# Altium PCB 8 Motors.PcbDoc (part 2 of 4)
Units mm, origin at the board's own origin, x right, y up, seen from the top; angles counter-clockwise.
Board outline 155 x 95 mm, 4 copper layers (Top Layer, GND, POWER, Bottom Layer), stack 0.778 mm thick; 196 components, 175 nets, 825 pads, 449 vias.
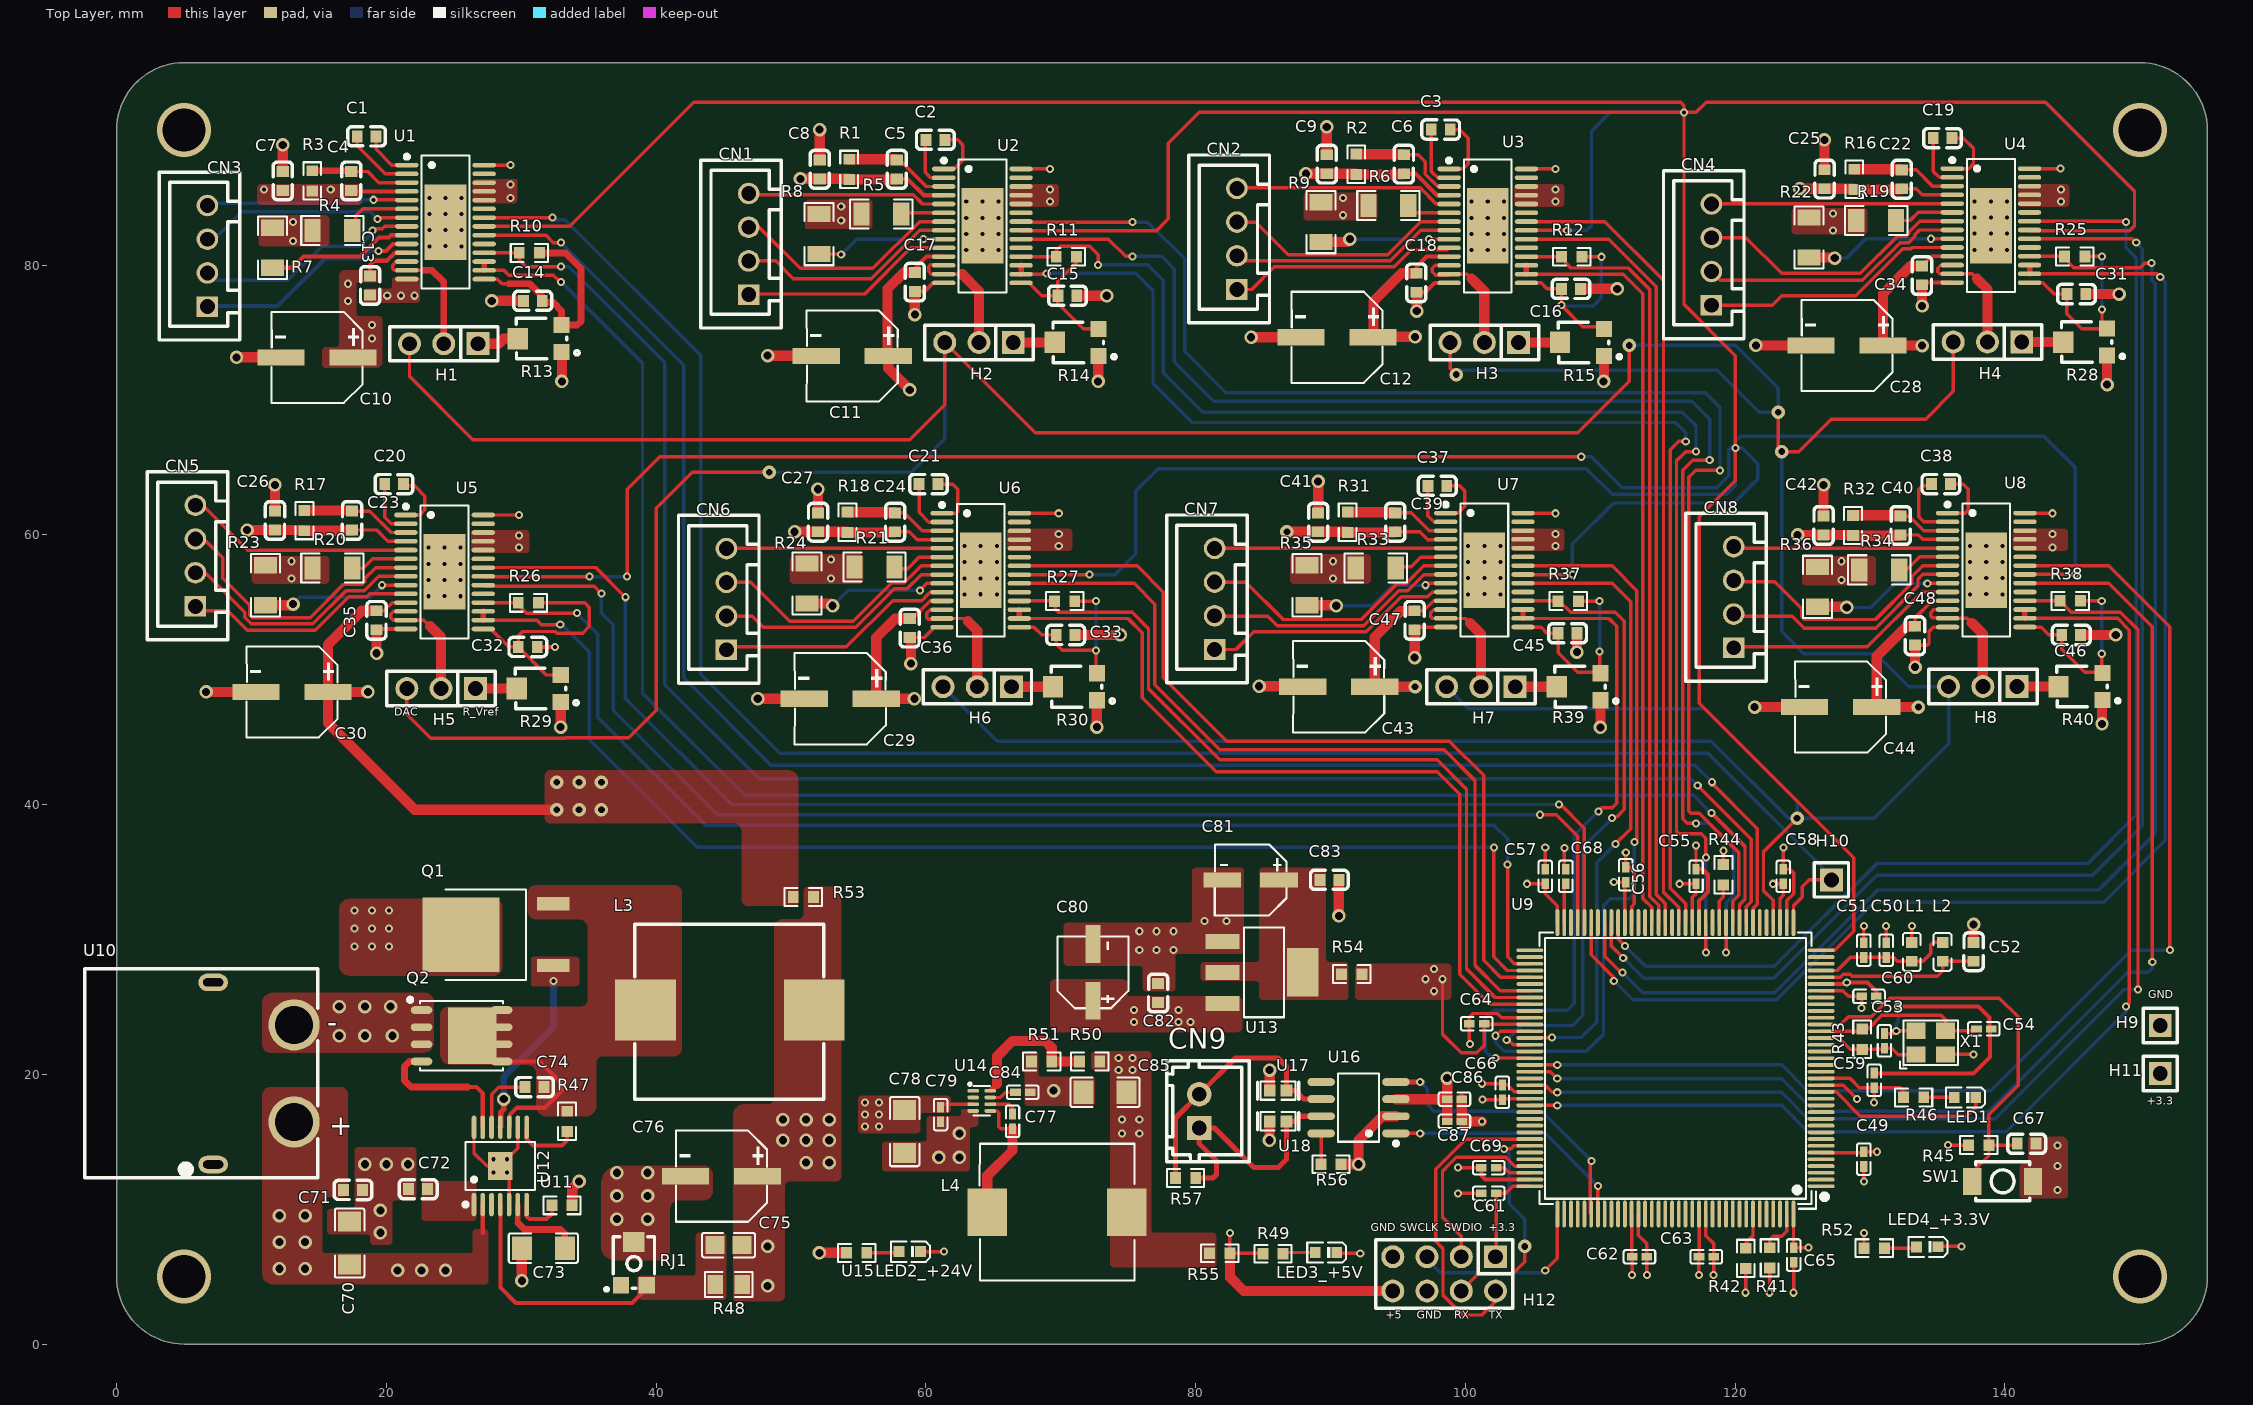
[diagram p0: Top Layer view]

## Part data (continued)
U13: library part AMS1117-3.3, "5V-3.3V", Dropout Voltage=1.3V@(800mA), JLCPCB Part Class="Basic Part", LCSC Part Name="输出3.3V 1A", Manufacturer=AMS, Maximum Input Voltage=-, MAX Output Current=1A, Output Voltage=3.3V, Power Supply Rejection Ratio (PSRR)=72dB@(120Hz), Add into BOM=yes, Comment_1=#NAME?, Convert to PCB=yes, Datasheet=https://atta.szlcsc.com/upload/public/pdf/source/20180727/C6186_7A095716F0823C02F1997A905E26C086.pdf, Device=AMS1117-3.3_C6186, Feature=-, Manufacturer Part=AMS1117-3.3, Noise=-, Number of Outputs=1, Operating Temperature=-, Output Polarity=正极, Output Type=固定, standby current=-, Supplier=LCSC, Supplier Footprint=SOT-223, Supplier Part=C6186, Symbol=AMS1117-3.3
U14: library part TPS62932DRLR, "DCDC BUCK", Input Voltage=3.8V~30V, JLCPCB Part Class="Extended Part", Manufacturer=TI(德州仪器), Operating Temperature=-40℃~+150℃@(TJ), Output Current (Max)=2A, Output Voltage=800mV~22V, Switching Frequency=2.2MHz, Add into BOM=yes, Comment_1=#NAME?, Convert to PCB=yes, Datasheet=https://www.ti.com/cn/lit/gpn/tps62933, Device=TPS62932DRLR, Function=降压型, LCSC Part Name=TPS62932DRLR, Manufacturer Part=TPS62932DRLR, Number of Outputs=1, Output Type=可调, Supplier=LCSC, Supplier Footprint=SOT-5x3-8, Supplier Part=C3032935, Switch tube (built-in/external)=内置, Symbol=TPS62932DRLR, Synchronous Rectification=是, Topology=降压式
U15: library part R0603_100KΩ, "0603电阻", JLCPCB Part Class="Extended Part", LCSC Part Name="100kΩ ±1% 100mW 厚膜电阻", Manufacturer=FOJAN(富捷), Manufacturer Part=FRC0603F1473TS, Operating Temperature Range=-55℃~+155℃, Overload Voltage (Max)=75V, Power(Watts)=100mW, Temperature Coefficient=±100ppm/℃, Tolerance=±1%, Add into BOM=yes, Comment_1=100kΩ, Convert to PCB=yes, Datasheet=https://atta.szlcsc.com/upload/public/pdf/source/20211221/925EC7D7225764EE0046F22065062C87.pdf, Device=FRC0603F1473TS, Supplier=LCSC, Supplier Footprint=0603, Supplier Part=C25803, Symbol=FRC0603F1473TS, Type=厚膜电阻
U16: library part SN65HVD230DR, "CAN收发器", JLCPCB Part Class="Extended Part", LCSC Part Name="1Mbps 3V~3.6V", Manufacturer=TI(德州仪器), Operating Temperature=-40℃~+85℃, Supply Voltage=3V~3.6V, Add into BOM=yes, Comment_1=#NAME?, Convert to PCB=yes, Data Rate=1Mbps, Datasheet=https://www.ti.com/cn/lit/gpn/sn65hvd230, Device=SN65HVD230DR, Manufacturer Part=SN65HVD230DR, Supplier=LCSC, Supplier Footprint=SOIC-8, Supplier Part=C12084, Symbol=SN65HVD230DR, Type=收发器
U17 U18: library part PESD0603-240, "ESD", Breakdown Voltage=-, JLCPCB Part Class="Extended Part", Manufacturer=Littelfuse(美国力特), Maximum Clamping Voltage=45V, Add into BOM=yes, Comment_1=#NAME?, Convert to PCB=yes, Datasheet=https://atta.szlcsc.com/upload/public/pdf/source/20180516/C207186_7CE2F9DCABF8CE4AA3105E54FFDB24F6.pdf, Device=PESD0603-240_C2929617, LCSC Part Name=PESD0603-240, Manufacturer Part=PESD0603-240, Number of Lines=单路, Supplier=LCSC, Supplier Footprint=0603, Supplier Part=C2929617, Symbol=PESD0603-240_C2929617, Type=ESD
X1: library part Osc_8M, "8Mhz晶振", Equivalent Series Resistance (ESR)=250Ω, External load capacitor=10pF, Frequency Stability(Full temperature range)=±15ppm, JLCPCB Part Class="Extended Part", LCSC Part Name="8MHz ±10ppm 10pF", Manufacturer=YJX(雅晶鑫), Manufacturer Part=TAXM8M4RDBCCT2T, Normal temperature Frequency Tolerance=±10ppm, Operating Temperature=-40℃~+85℃, Add into BOM=yes, Comment_1=8MHz, Convert to PCB=yes, Crystal Type=贴片晶振, Datasheet=https://atta.szlcsc.com/upload/public/pdf/source/20190626/C400090_CF95B89E745AFE4EF2E392EF8AC009D6.pdf, Device=TAXM8M4RDBCCT2T, Supplier=LCSC, Supplier Footprint=SMD3225-4P, Supplier Part=C400090, Symbol=TAXM8M4RDBCCT2T

## Via types
v1: diameter 0.6, hole 0.3, Top Layer to Bottom Layer, tented both sides, 222 vias
v2: diameter 0.5, hole 0.3, Top Layer to Bottom Layer, tented both sides, 96 vias
v3: diameter 1, hole 0.6, Top Layer to Bottom Layer, tented both sides, 88 vias
v4: diameter 1, hole 0.6, Top Layer to Bottom Layer, 17 vias
v5: diameter 1, hole 0.5, Top Layer to Bottom Layer, tented both sides, 16 vias
v6: diameter 4, hole 3.2, Top Layer to Bottom Layer, tented both sides, 4 vias
v7: diameter 0.61, hole 0.305, Top Layer to Bottom Layer, tented both sides, 4 vias
v8: diameter 0.6, hole 0.3, Top Layer to Bottom Layer, 2 vias

## Nets (pads, with @x,y where several pads share a name; then routed paths per layer and width w, separated by ;. In a path a pad name is that pad's centre, name@x,y a point inside that pad or via, vN(x,y) a via of type N, cw(c..) or ccw(c..) an arc to the next point about the centre after c; other vN are vias at no path point)
BOOT0: R42.2 U9.138 | length 2.8
  Top Layer w0.254: R42.2@120.777,7.103 120.777,7.493 121.32,8.036 U9.138@121.32,9.647
CAN1rx: U9.114 U16.4 | length 21.6
  Top Layer w0.254: U9.114@109.32,9.647 109.266,9.701 109.266,13.508 v1(109.347,13.589)
  Top Layer w0.381: U16.4@94.847,19.431 v1(96.647,19.431)
  Bottom Layer w0.254: v1(96.647,19.431) 97.155,18.923 97.155,17.78 97.663,17.272 105.664,17.272 v1(109.347,13.589)
CAN1tx: U9.115 U16.1 | length 18.7
  Top Layer w0.254: U16.1@94.847,15.621 v1(96.647,15.621) ; U9.115@109.82,9.647 v1(109.82,11.719)
  Bottom Layer w0.254: v1(96.647,15.621) 105.918,15.621 v1(109.82,11.719)
CAN_N: CN9.2 R57.1 U16.6 U17.2 | length 19.4
  Top Layer w0.381: R57.1@78.495,12.319 78.495,16.753 CN9.2@80.264,18.522 82.951,21.209 86.106,21.209 86.728,20.587 U17.2@86.728,18.796 87.355,18.796 87.99,18.161 U16.6@89.303,18.161
CAN_P: CN9.1 R57.2 U16.7 U18.2 | length 19.1
  Top Layer w0.381: R57.2@80.001,12.319 81.28,12.319 81.534,12.573 81.534,13.589 80.264,14.859 CN9.1@80.264,16.022 81.387,16.022 84.328,13.081 86.106,13.081 86.728,13.703 U18.2@86.728,16.51 87.355,16.51 87.736,16.891 U16.7@89.303,16.891